# EAGLE board ADS124S08 (EAGLE 9.1.1)
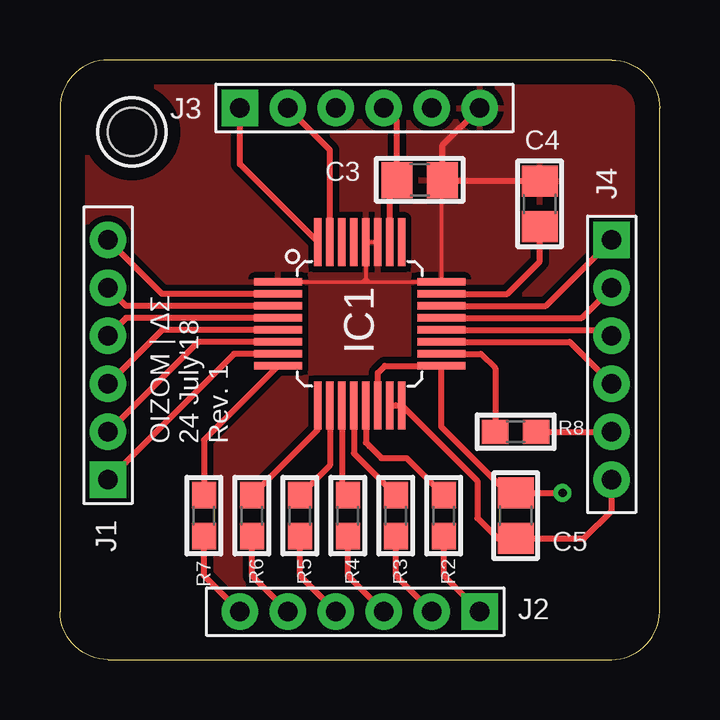
[diagram p0: board, top side]
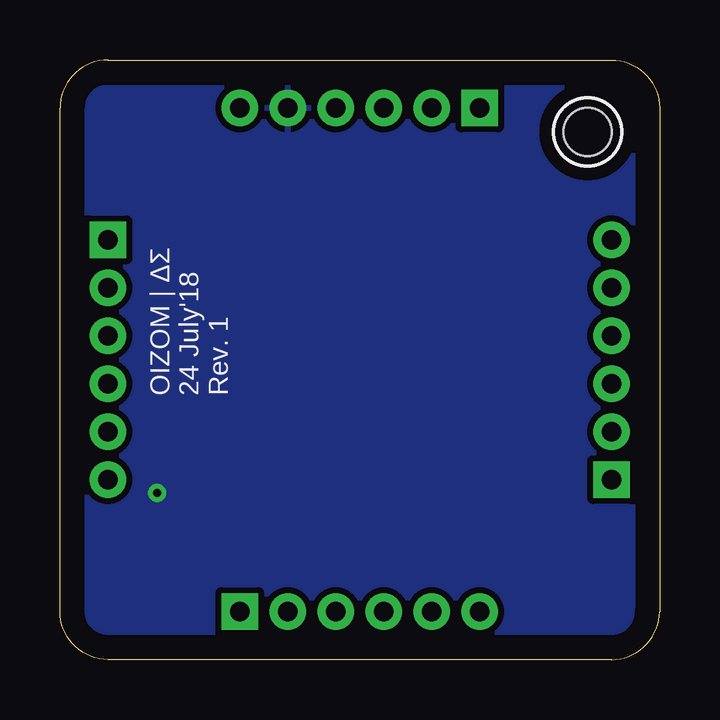
[diagram p1: board, bottom side, seen from below]

Size 25 x 25 mm. Coordinates in mm from the lower left corner, seen from the top.
Outline: 2,0 23,0 arc90 25,2 25,23 arc90 23,25 2,25 arc90 0,23 0,2 arc90 2,0
Copper layers (1*16): Top 0.035mm / dielectric 1.5mm / Bottom 0.035mm
Design rules "default": minimum track width 6mil, minimum drill 0.35mm, track to track 6mil, track to pad 6mil, pad to pad 6mil, via to via 6mil, smd to smd 6mil, copper to edge 40mil, drill to drill 6mil, minimum pad ring 10mil, minimum via ring 8mil, stop-mask expansion 4mil, vias tented up to drill 0mil, thermal gap 10mil
Holes 2 mm at 3,22

## Footprints (pad centres in the part's own frame; a part is rotated, then mirrored left to right if it is on the bottom)
0805 = smd 1.3 x 1.5: 1 -0.95,0; 2 0.95,0
ADS124S08 = smd 2 x 0.3: 1 -3.4,1.75; 2 -3.4,1.25; 3 -3.4,0.75; 4 -3.4,0.25; 5 -3.4,-0.25; 6 -3.4,-0.75; 7 -3.4,-1.25; 8 -3.4,-1.75; 17 3.4,-1.75; 18 3.4,-1.25; 19 3.4,-0.75; 20 3.4,-0.25; 21 3.4,0.25; 22 3.4,0.75; 23 3.4,1.25; 24 3.4,1.75 | smd 0.3 x 2: 9 -1.75,-3.4; 10 -1.25,-3.4; 11 -0.75,-3.4; 12 -0.25,-3.4; 13 0.25,-3.4; 14 0.75,-3.4; 15 1.25,-3.4; 16 1.75,-3.4; 25 1.75,3.4; 26 1.25,3.4; 27 0.75,3.4; 28 0.25,3.4; 29 -0.25,3.4; 30 -0.75,3.4; 31 -1.25,3.4; 32 -1.75,3.4
H10-2.0 = drill 0.813 pad 1.524 square: 1 0,5 | drill 0.813 pad 1.524: 2 0,3; 3 0,1; 4 0,-1; 5 0,-3; 6 0,-5
0603 = smd 1.1 x 1: 1 -0.85,0; 2 0.85,0

## Placement (x,y rotation side)
C3  330nF  [0805]  15,20 0 top
C4  1uF  [0805]  20,19 270 top
C5  0.1uF  [0805]  19,6 90 top
IC1  ADS124S08  [ADS124S08]  12.5,14 0 top
J1  10p-2.0  [H10-2.0]  2,12.5 180 top
J2  10p-2.0  [H10-2.0]  12.5,2 270 top
J3  10p-2.0  [H10-2.0]  12.5,23 90 top
J4  10p-2.0  [H10-2.0]  23,12.5 0 top
R2  47  [0603]  16,6 270 top
R3  47  [0603]  14,6 270 top
R4  47  [0603]  12,6 270 top
R5  47  [0603]  10,6 270 top
R6  [0603]  8,6 270 top
R7  47  [0603]  6,6 270 top
R8  47  [0603]  19,9.5 0 top

## Library data of the parts
C3-C5 = microbuilder; MF: AVX; MPN: 08055C104JAT2A; OC_FARNELL: 1740673
IC1 = OIZOM; OC_FARNELL: unknown
J1-J4 = OIZOM; MPN: F243-1110A1BSUA1
R2-R8 = microbuilder; OC_FARNELL: unknown

## Nets
3V3: C5.1 IC1.15 IC1.16 J4.6
!RESET: IC1.18 R8.1
+5V: C3.1 IC1.26 J3.4
AGND: C3.2 C4.1 IC1.1 IC1.24 IC1.27 IC1.28 J3.6
AIN0: IC1.7 J1.1
AIN1: IC1.6 J1.2
AIN2: IC1.5 J1.3
AIN3: IC1.4 J1.4
AIN4: IC1.3 J1.5
AIN5: IC1.2 J1.6
AIN6: IC1.32 J3.1
AIN7: IC1.31 J3.2
AIN8: IC1.22 J4.1
AIN9: IC1.21 J4.2
AIN10: IC1.20 J4.3
AIN11: IC1.19 J4.4
B3/CS: J2.5 R6.2
B4/DRDY: J2.1 R2.2
B5/START: J2.6 R7.2
CS: IC1.9 R6.1
D7/RESET_SPI: J4.5 R8.2
DGND: C5.2 IC1.14 IC1.17 J3.5
DRDY: IC1.13 R2.1
MISO: IC1.12 R3.1
MISO/A4: J2.2 R3.2
MOSI: IC1.10 R5.1
MOSI/A5: J2.4 R5.2
N$3: IC1.29
N$4: IC1.30
REFOUT: C4.2 IC1.23
SCK: IC1.11 R4.1
SCK/A3: J2.3 R4.2
START: IC1.8 R7.1

## Tracks (layer width: path | path; a pad name or v marks a point on that pad's centre or on a via)
3V3
  Top 0.254: IC1.15 14,10.6 IC1.16 17.4,7.45 17.4,5.9 18.25,5.05 C5.1 21.85,5.05 23,6.2 J4.6
!RESET
  Top 0.254: R8.1 18.15,12.15 17.55,12.75 IC1.18
+5V
  Top 0.254: IC1.26 13.75,19.7 C3.1 14.05,22.45 J3.4
AGND
  Top 0.152: IC1.1 12.6,15.75 | 12.6,15.75 12.7,15.75 | 12.7,15.75 12.9,15.75 | 12.9,15.75 IC1.24 15.9,19.95 C3.2 | IC1.27 IC1.28 12.75,15.9 | 12.75,15.9 12.75,15.8 12.7,15.75 | 12.6,15.75 12.75,15.9 | 12.75,15.9 12.9,15.75
  Top 0.254: C4.1 16,19.95 C3.2 15.95,21.45 J3.6
  pour Top (isolate 0.254): -1,-1 -1,26 26,26 26,-1
AIN0
  Top 0.254: IC1.7 7.25,12.75 J1.1
AIN1
  Top 0.254: IC1.6 5.75,13.25 J1.2
AIN2
  Top 0.254: IC1.5 4.25,13.75 J1.3
AIN3
  Top 0.254: IC1.4 2.75,14.25 J1.4
AIN4
  Top 0.254: IC1.3 2.75,14.75 J1.5
AIN5
  Top 0.254: IC1.2 4.25,15.25 J1.6
AIN6
  Top 0.254: IC1.32 7.5,20.65 J3.1
AIN7
  Top 0.254: IC1.31 11.25,21.25 J3.2
AIN8
  Top 0.254: IC1.22 20.25,14.75 J4.1
AIN9
  Top 0.254: IC1.21 21.75,14.25 J4.2
AIN10
  Top 0.254: IC1.20 22.75,13.75 J4.3
AIN11
  Top 0.254: IC1.19 21.25,13.25 J4.4
B3/CS
  Top 0.254: J2.5 8,3.5 R6.2
B4/DRDY
  Top 0.254: J2.1 16,3.5 R2.2
B5/START
  Top 0.254: J2.6 6,3.5 R7.2
CS
  Top 0.254: R6.1 10.75,9.6 IC1.9
D7/RESET_SPI
  Top 0.254: R8.2 J4.5
DGND  (via drill 0.35)
  Top 0.254: IC1.14 13.25,11.95 13.55,12.25 15.8,12.25 IC1.17 15.9,9.7 18.65,6.95 C5.2 v20.95,6.95
  pour Bottom (isolate 0.254): -2,-2 -2,27 27,27 27,-2
DRDY
  Top 0.254: R2.1 14.45,8.4 13.4,8.4 12.9,8.9 12.75,9.05 IC1.13
MISO
  Top 0.254: IC1.12 12.25,8.6 R3.1
MISO/A4
  Top 0.254: J2.2 14,3.5 R3.2
MOSI
  Top 0.254: IC1.10 11.25,8.1 R5.1
MOSI/A5
  Top 0.254: J2.4 10,3.5 R5.2
REFOUT
  Top 0.254: IC1.23 18.65,15.25 20,16.6 C4.2
SCK
  Top 0.254: IC1.11 11.75,7.1 R4.1
SCK/A3
  Top 0.254: J2.3 12,3.5 R4.2
START
  Top 0.254: IC1.8 6,9.15 R7.1

## Text on the board
tPlace: OIZOM | ΔΣ / 24 July'18 / Rev. 1
bPlace: OIZOM | ΔΣ / 24 July'18 / Rev. 1